# Altium PCB RF315Mhz.PcbDoc (part 1 of 5)
Units mil, origin at the board's own origin, x right, y up, seen from the top; angles counter-clockwise.
Board outline 4094.49 x 3779.53 mil, 2 copper layers (Top Layer, Bottom Layer); 180 components, 20 nets, 660 pads, 48 vias.
Unrouted connection lines stored in the file: 100.
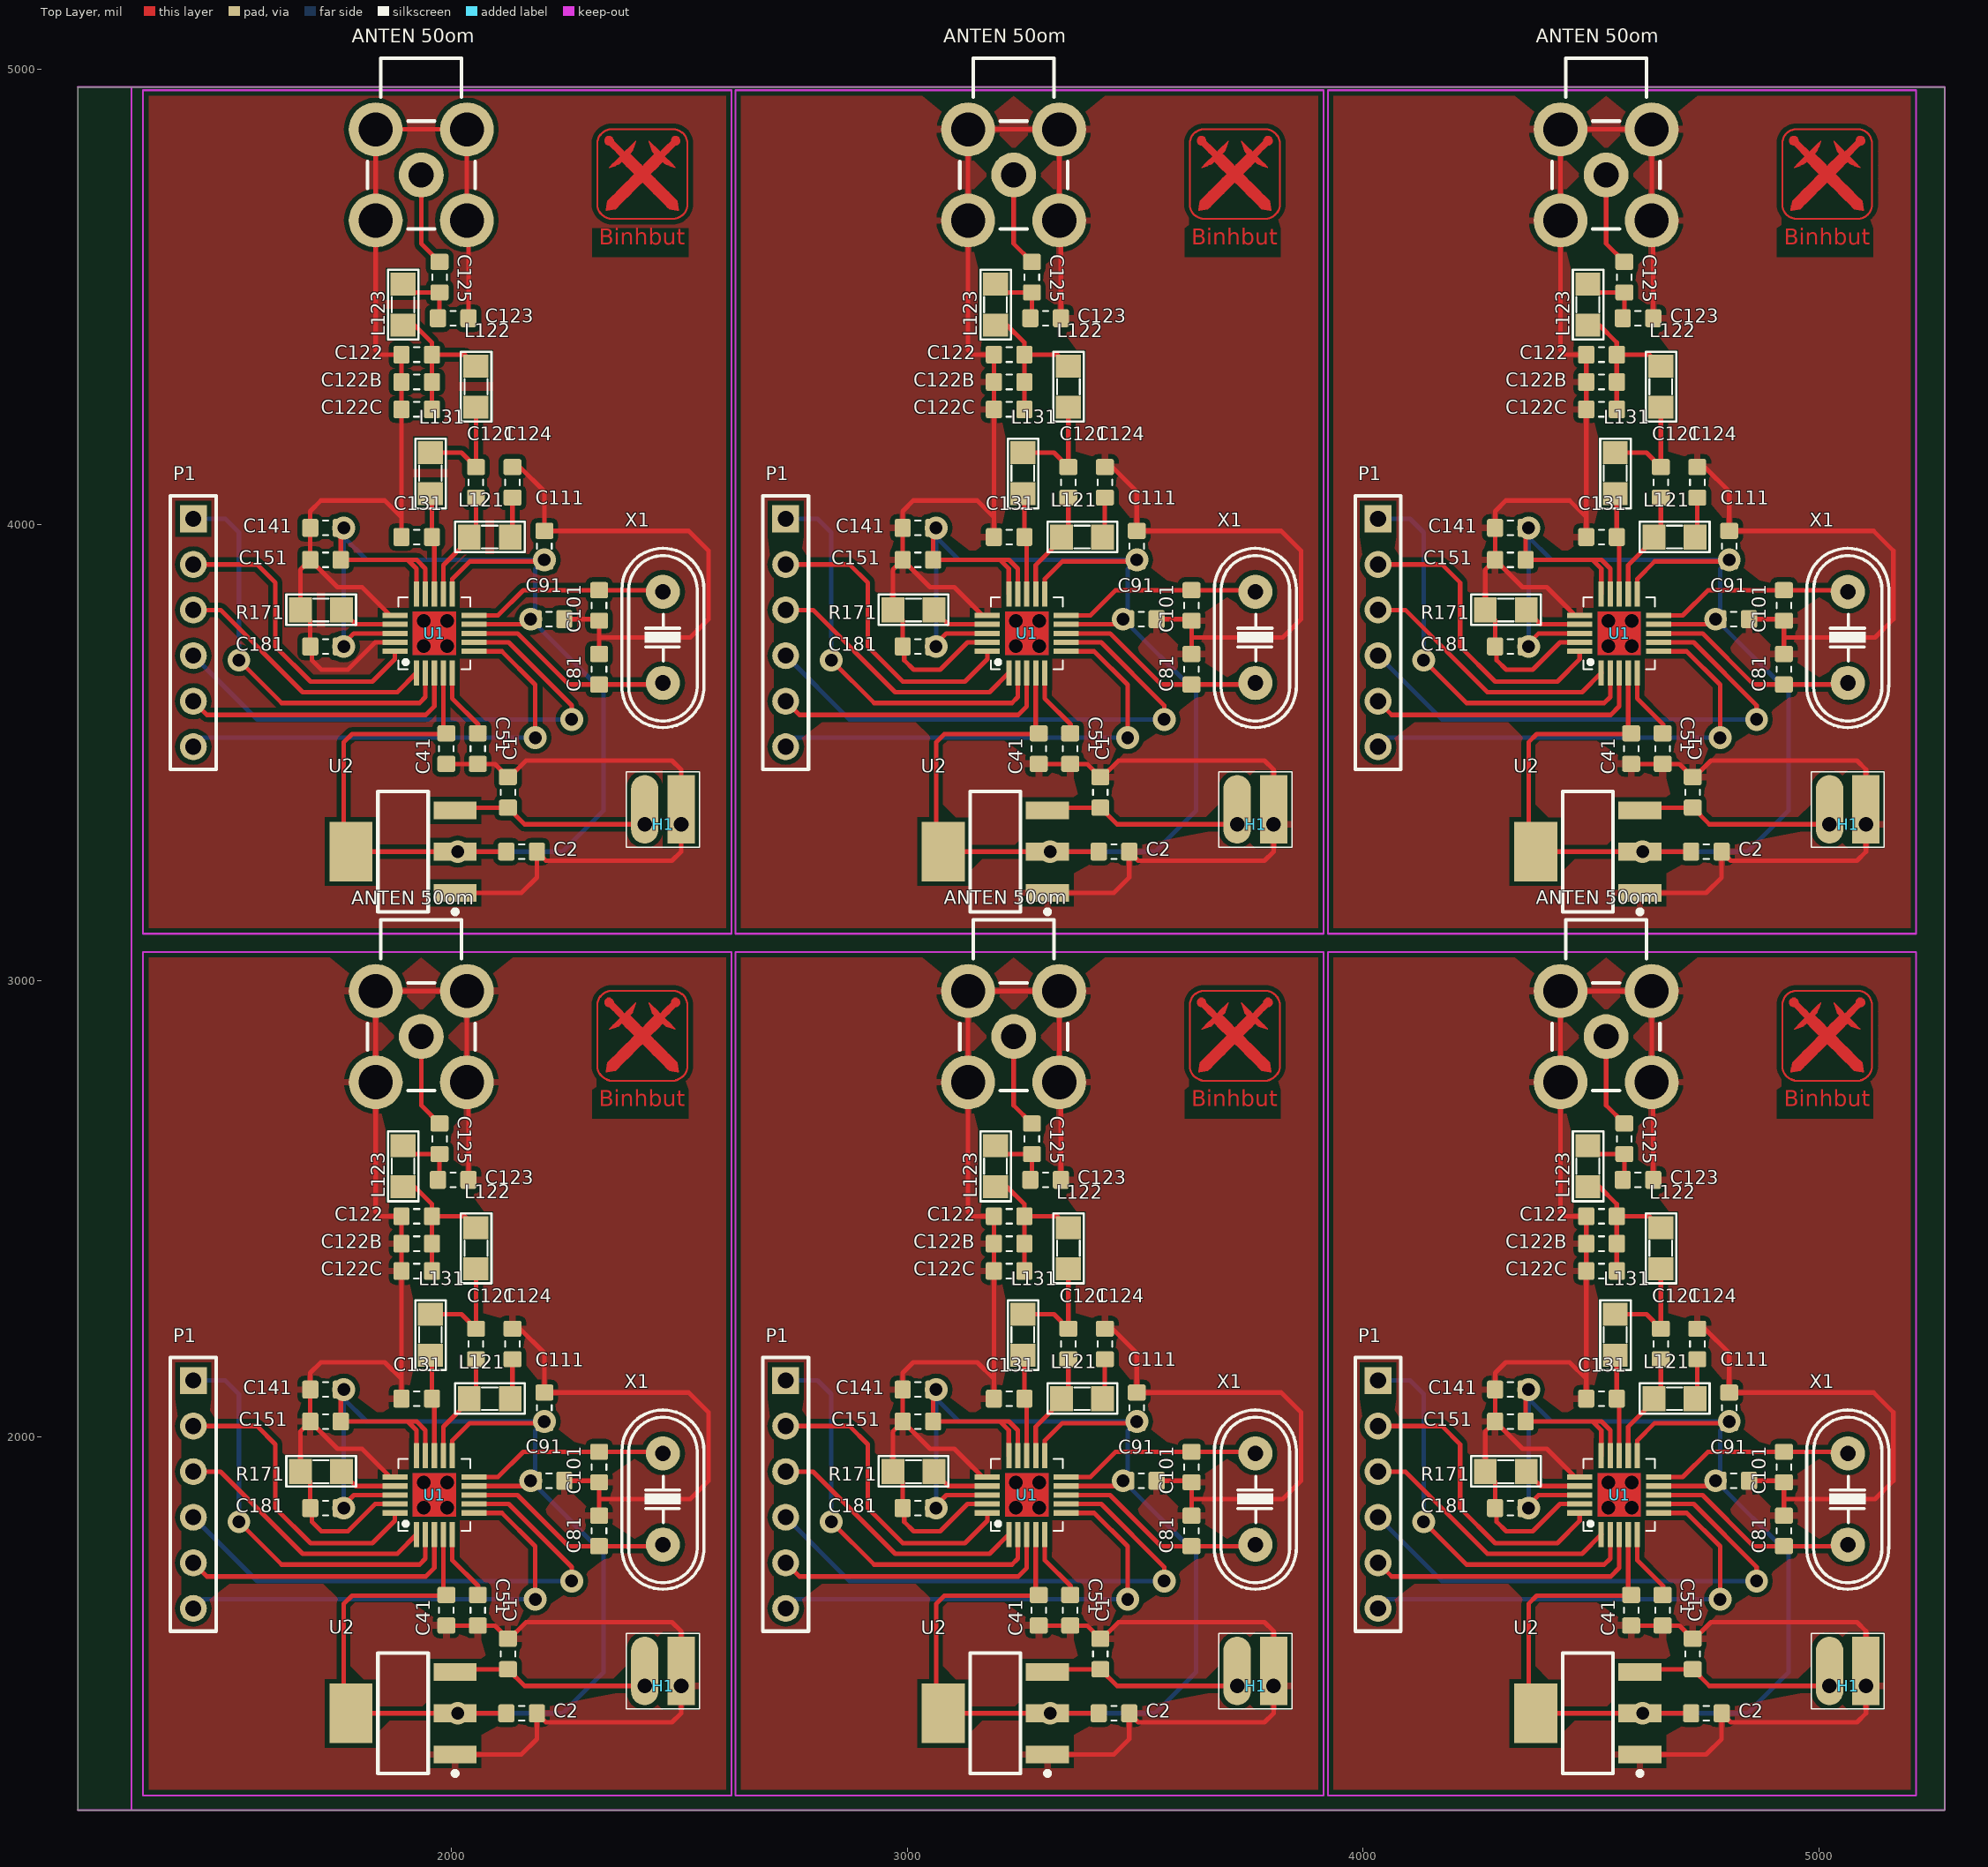
[diagram p0: Top Layer view]
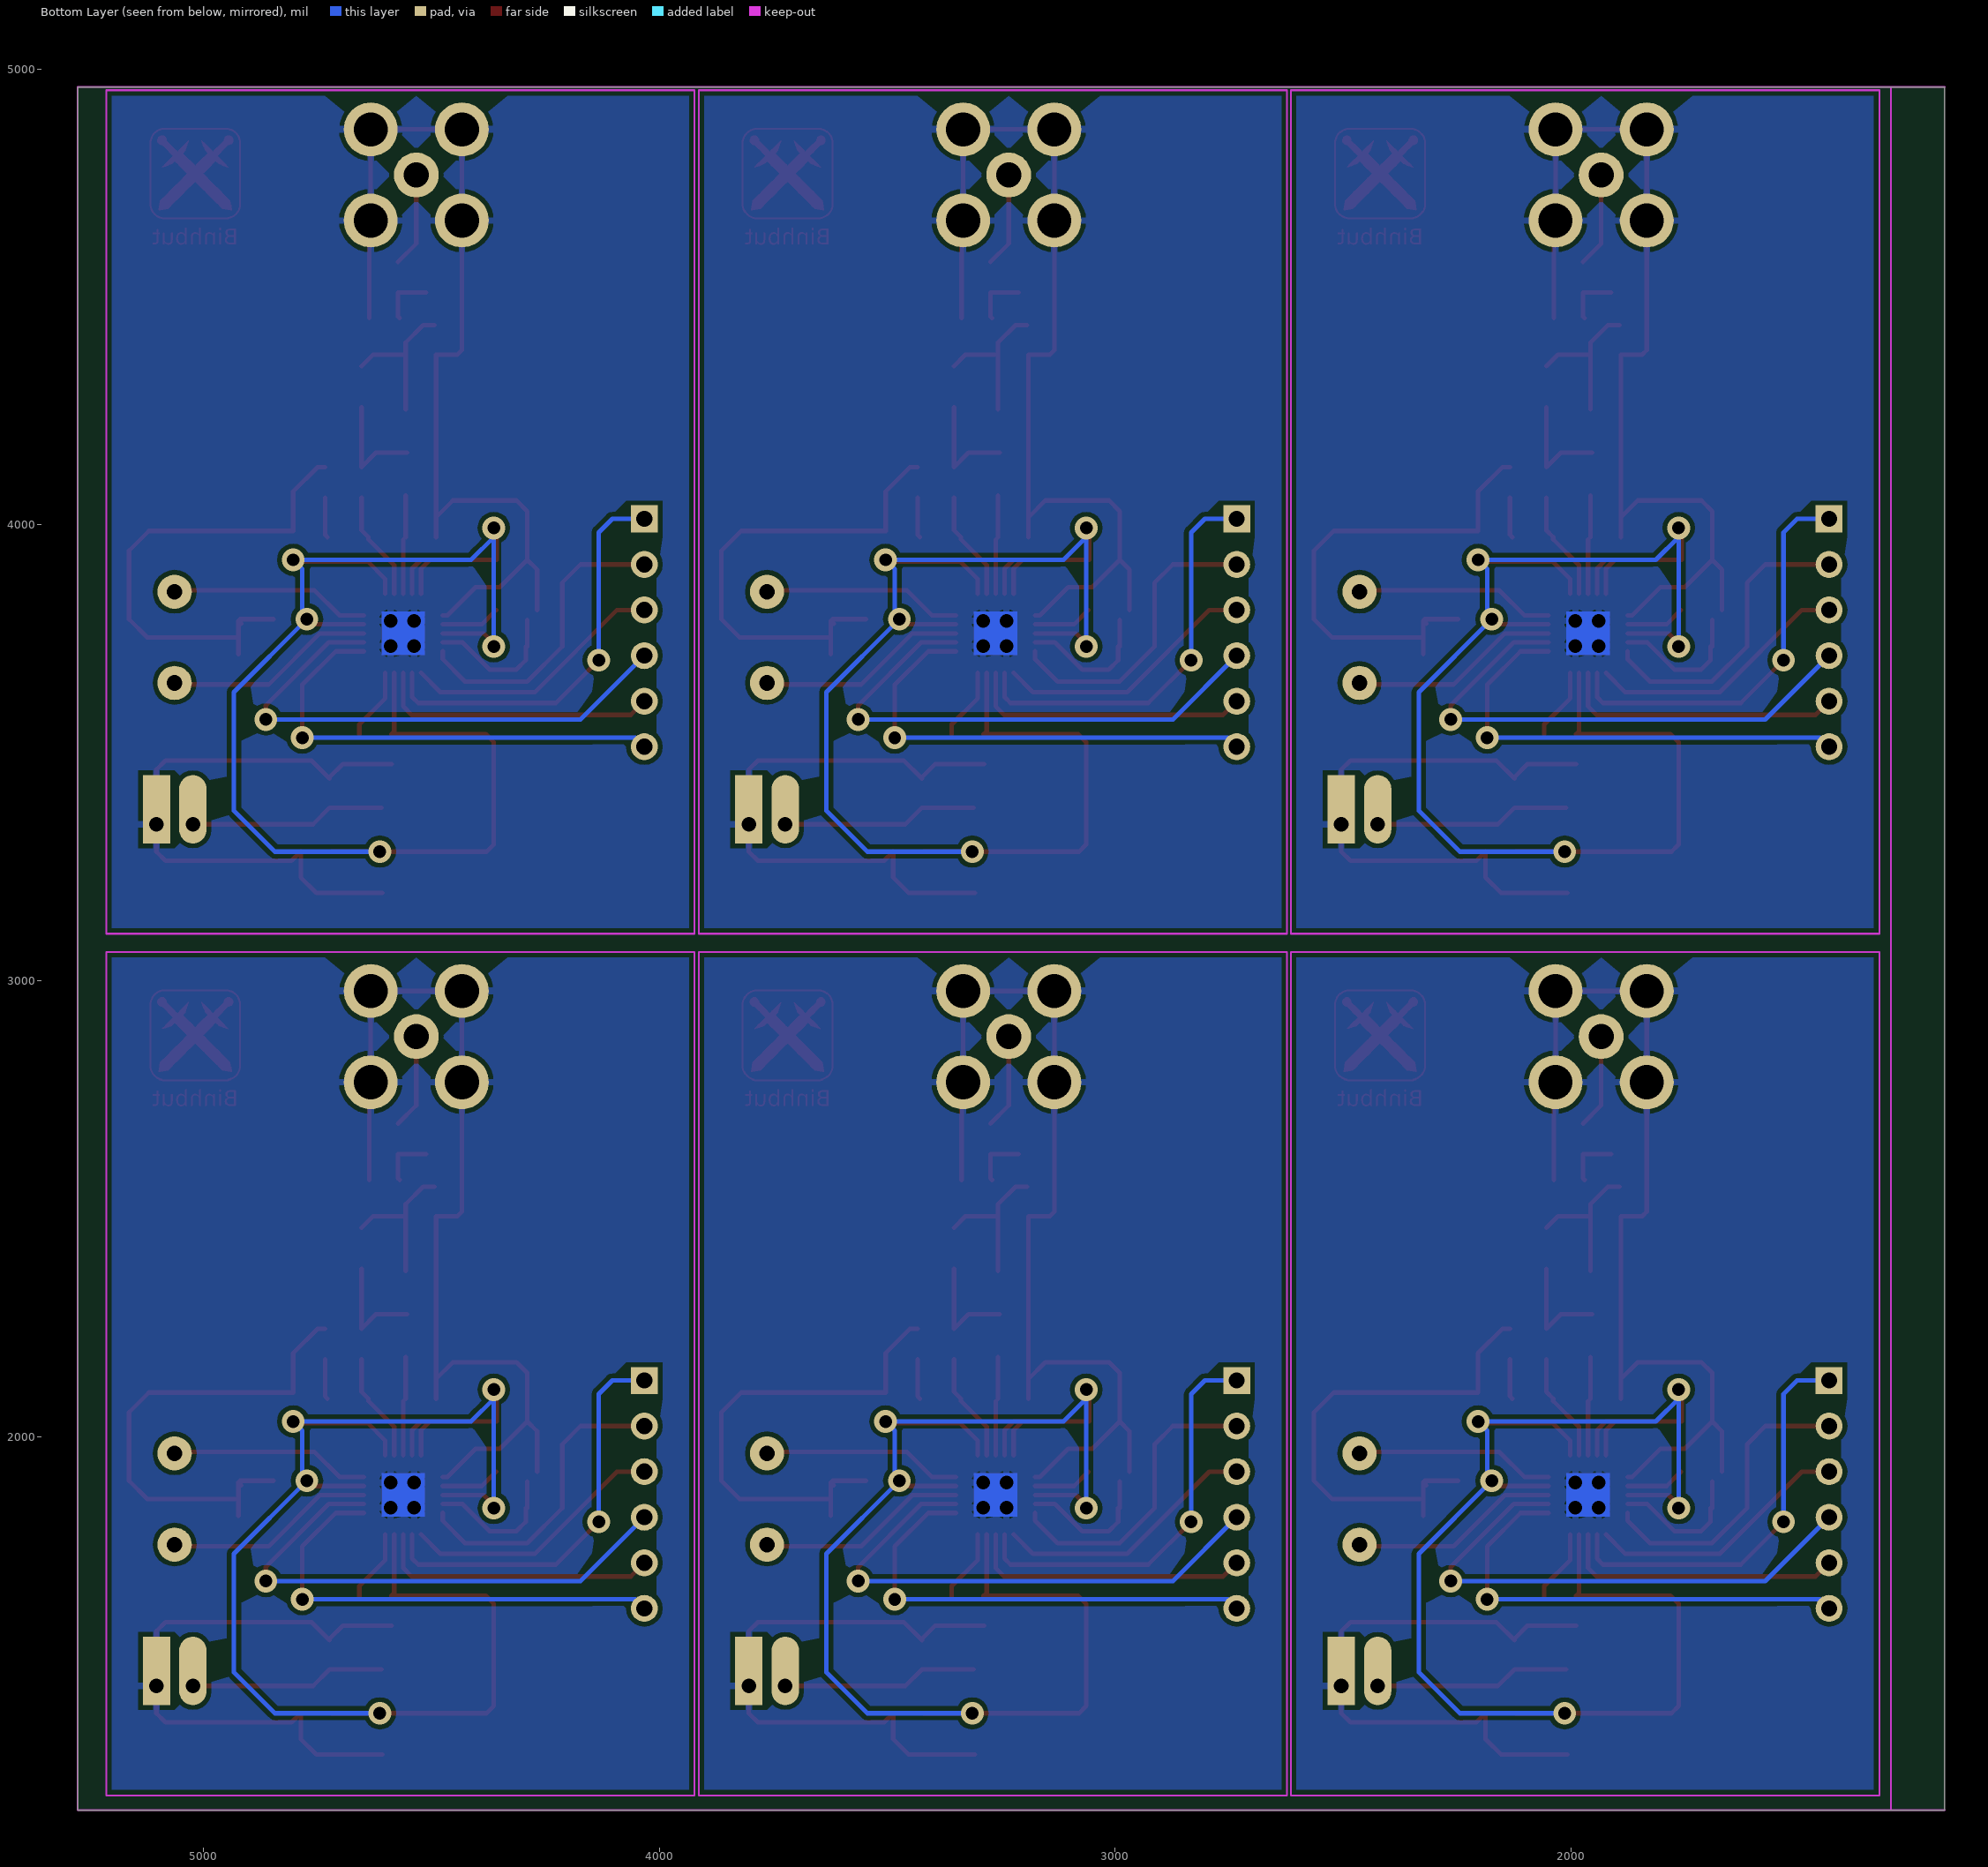
[diagram p1: Bottom Layer view, seen from below]
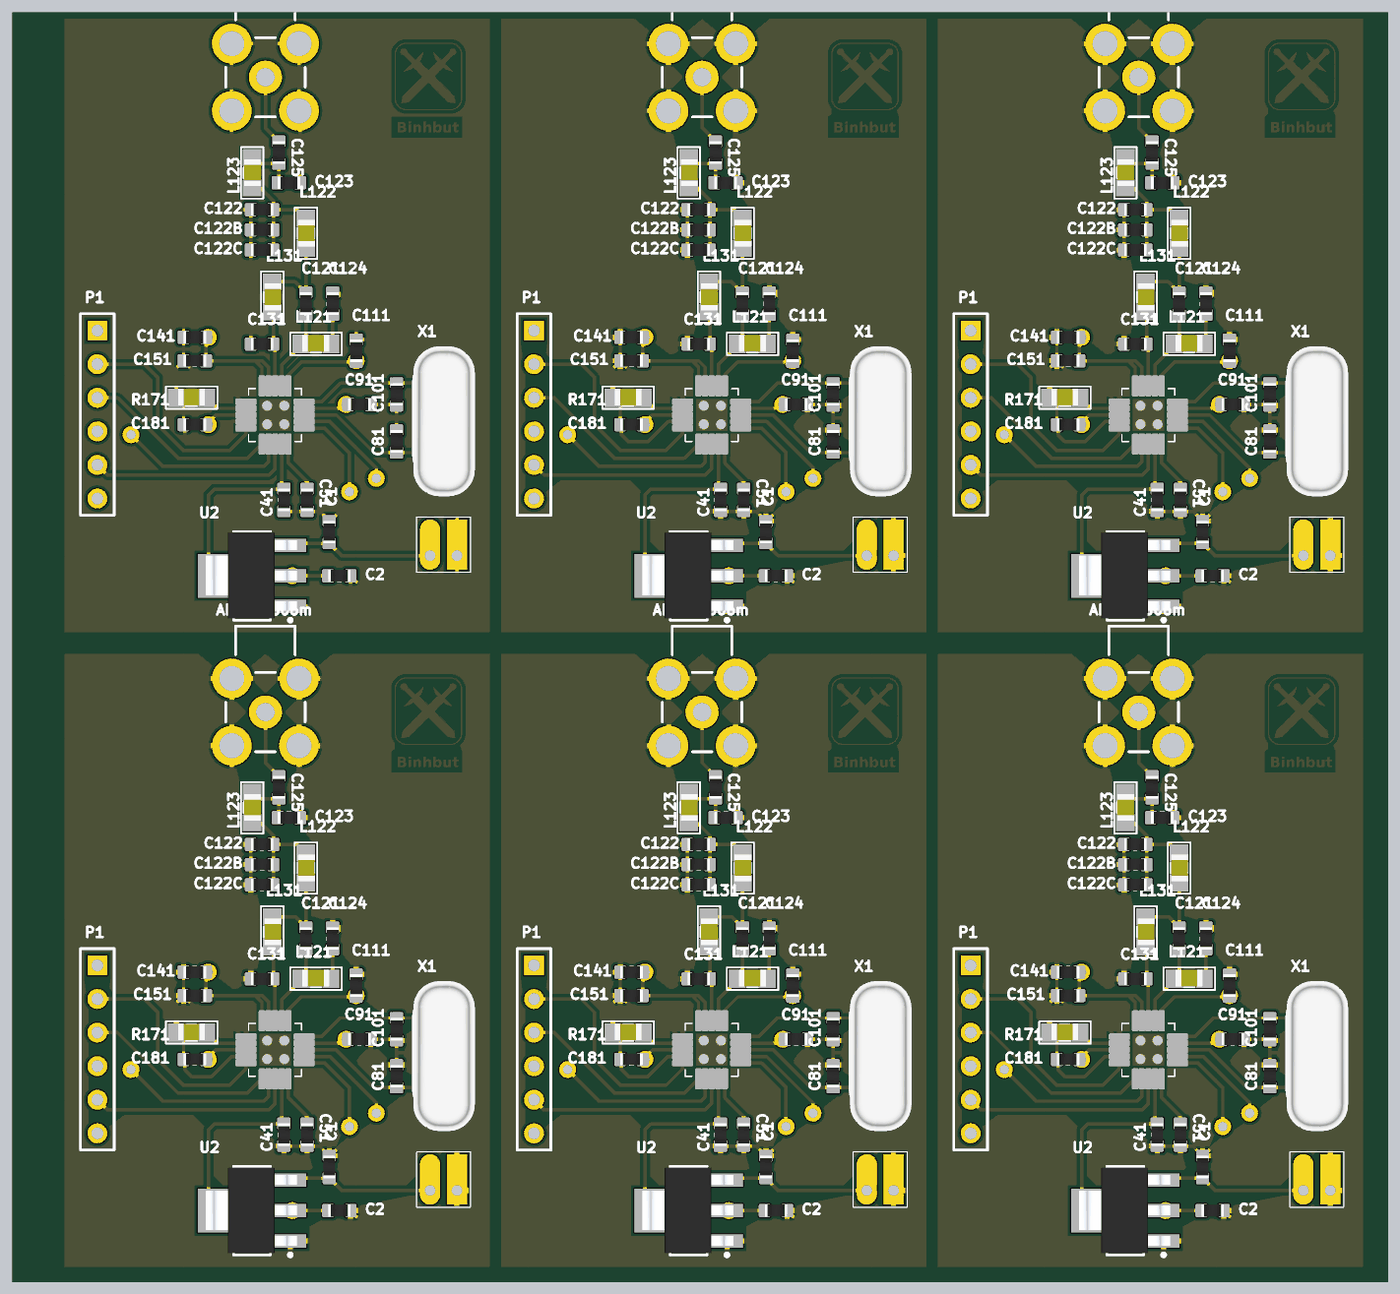
[diagram p6: 3D render of the assembled board from above, using the file's embedded part models]

## Layer stack, top to bottom
Top Layer: signal copper 1.4
Dielectric: dielectric 12.6, FR-4, Dk 4.8
Bottom Layer: signal copper 1.4

## Board outline
1181.1,1181.1 1181.1,4960.63 5275.59,4960.63 5275.59,1181.1

## Design rules (kind name [scope] priority, off if disabled: settings)
Clearance Clearance_1 [InNet('GND')] p1: gap=10
Clearance [All] p2: gap=1
ComponentClearance [All] p1: gap=2 collisioncheckmode=3 verticalgap=2 showdistances=FALSE
PolygonConnect [All] p1: connectstyle=Relief reliefconductorwidth=15 reliefentries=4 polygonreliefangle="90 Angle" airgapwidth=10
RoutingVias [All] p1: holewidth=28 width=50 viastyle="Through Hole" minholewidth=28 minwidth=50 maxholewidth=28 maxwidth=50
ShortCircuit [All] p1: allowed=TRUE
SilkToSilkClearance [All] p1: silktosilkclearance=2
SilkToSolderMaskClearance [IsPad] p1: minsilkscreentomaskgap=0 clearancetoexposedcopper=TRUE
SolderMaskExpansion [All] p1: expansion=4
Width [All] p1: maxlimit=10 minlimit=10 preferedwidth=10
24 further rules are at their usual default settings.

## Components (designator, comment, footprint, x,y, rotation, side; value= is the part's Value field where it differs from the comment)
"ANTEN 50om" "Header 2" MCX5.08-H5 4532.99,3133.78 r270 top
"ANTEN 50om" "Header 2" MCX5.08-H5 4532.99,5023.54 r270 top
"ANTEN 50om" "Header 2" MCX5.08-H5 3233.78,5023.54 r270 top
"ANTEN 50om" "Header 2" MCX5.08-H5 1934.57,5023.54 r270 top
"ANTEN 50om" "Header 2" MCX5.08-H5 3233.78,3133.78 r270 top
"ANTEN 50om" "Header 2" MCX5.08-H5 1934.57,3133.78 r270 top
C1 "104" 0603ESDA 4722.99,1523.78 r270 top
C1 "104" 0603ESDA 4722.99,3413.54 r270 top
C1 "104" 0603ESDA 3423.78,3413.54 r270 top
C1 "104" 0603ESDA 2124.57,3413.54 r270 top
C1 "104" 0603ESDA 3423.78,1523.78 r270 top
C1 "104" 0603ESDA 2124.57,1523.78 r270 top
C2 "104" 0603ESDA 4752.99,1393.78 r180 top
C2 "104" 0603ESDA 4752.99,3283.54 r180 top
C2 "104" 0603ESDA 3453.78,3283.54 r180 top
C2 "104" 0603ESDA 2154.57,3283.54 r180 top
C2 "104" 0603ESDA 3453.78,1393.78 r180 top
C2 "104" 0603ESDA 2154.57,1393.78 r180 top
C41 "104" 0603ESDA 4587.99,1619.78 r90 top
C41 "104" 0603ESDA 4587.99,3509.54 r90 top
C41 "104" 0603ESDA 3288.78,3509.54 r90 top
C41 "104" 0603ESDA 1989.57,3509.54 r90 top
C41 "104" 0603ESDA 3288.78,1619.78 r90 top
C41 "104" 0603ESDA 1989.57,1619.78 r90 top
C51 "104" 0603ESDA 4656.99,1619.78 r90 top
C51 "104" 0603ESDA 4656.99,3509.54 r90 top
C51 "104" 0603ESDA 3357.78,3509.54 r90 top
C51 "104" 0603ESDA 2058.57,3509.54 r90 top
C51 "104" 0603ESDA 3357.78,1619.78 r90 top
C51 "104" 0603ESDA 2058.57,1619.78 r90 top
C81 "27pF" 0603ESDA 4922.99,1793.78 r270 top
C81 "27pF" 0603ESDA 4922.99,3683.54 r270 top
C81 "27pF" 0603ESDA 3623.78,3683.54 r270 top
C81 "27pF" 0603ESDA 2324.57,3683.54 r270 top
C81 "27pF" 0603ESDA 3623.78,1793.78 r270 top
C81 "27pF" 0603ESDA 2324.57,1793.78 r270 top
C91 "103" 0603ESDA 4812.99,1903.78 r180 top
C91 "103" 0603ESDA 4812.99,3793.54 r180 top
C91 "103" 0603ESDA 3513.78,3793.54 r180 top
C91 "103" 0603ESDA 2214.57,3793.54 r180 top
C91 "103" 0603ESDA 3513.78,1903.78 r180 top
C91 "103" 0603ESDA 2214.57,1903.78 r180 top
C101 "27pF" 0603ESDA 4922.99,1933.78 r90 top
C101 "27pF" 0603ESDA 4922.99,3823.54 r90 top
C101 "27pF" 0603ESDA 3623.78,3823.54 r90 top
C101 "27pF" 0603ESDA 2324.57,3823.54 r90 top
C101 "27pF" 0603ESDA 3623.78,1933.78 r90 top
C101 "27pF" 0603ESDA 2324.57,1933.78 r90 top
C111 "220pF" 0603ESDA 4802.99,2063.78 r270 top
C111 "220pF" 0603ESDA 4802.99,3953.54 r270 top
C111 "220pF" 0603ESDA 3503.78,3953.54 r270 top
C111 "220pF" 0603ESDA 2204.57,3953.54 r270 top
C111 "220pF" 0603ESDA 3503.78,2063.78 r270 top
C111 "220pF" 0603ESDA 2204.57,2063.78 r270 top
C121 "6.8pF" 0603ESDA 4652.99,2203.78 r270 top
C121 "6.8pF" 0603ESDA 4652.99,4093.54 r270 top
C121 "6.8pF" 0603ESDA 3353.78,4093.54 r270 top
C121 "6.8pF" 0603ESDA 2054.57,4093.54 r270 top
C121 "6.8pF" 0603ESDA 3353.78,2203.78 r270 top
C121 "6.8pF" 0603ESDA 2054.57,2203.78 r270 top
C122 "12pF" 0603ESDA 4522.99,2483.78 r180 top
C122 "12pF" 0603ESDA 4522.99,4373.54 r180 top
C122 "12pF" 0603ESDA 3223.78,4373.54 r180 top
C122 "12pF" 0603ESDA 1924.57,4373.54 r180 top
C122 "12pF" 0603ESDA 3223.78,2483.78 r180 top
C122 "12pF" 0603ESDA 1924.57,2483.78 r180 top
C122B "12pF" 0603ESDA 4522.99,2423.78 r180 top
C122B "12pF" 0603ESDA 4522.99,4313.54 r180 top
C122B "12pF" 0603ESDA 3223.78,4313.54 r180 top
C122B "12pF" 0603ESDA 1924.57,4313.54 r180 top
C122B "12pF" 0603ESDA 3223.78,2423.78 r180 top
C122B "12pF" 0603ESDA 1924.57,2423.78 r180 top
C122C "12pF" 0603ESDA 4522.99,2363.78 r180 top
C122C "12pF" 0603ESDA 4522.99,4253.54 r180 top
C122C "12pF" 0603ESDA 3223.78,4253.54 r180 top
C122C "12pF" 0603ESDA 1924.57,4253.54 r180 top
C122C "12pF" 0603ESDA 3223.78,2363.78 r180 top
C122C "12pF" 0603ESDA 1924.57,2363.78 r180 top
C123 "6.8pF" 0603ESDA 4602.99,2563.78 r0 top
C123 "6.8pF" 0603ESDA 4602.99,4453.54 r0 top
C123 "6.8pF" 0603ESDA 3303.78,4453.54 r0 top
C123 "6.8pF" 0603ESDA 2004.57,4453.54 r0 top
C123 "6.8pF" 0603ESDA 3303.78,2563.78 r0 top
C123 "6.8pF" 0603ESDA 2004.57,2563.78 r0 top
C124 "220pF" 0603ESDA 4732.99,2203.78 r270 top
C124 "220pF" 0603ESDA 4732.99,4093.54 r270 top
C124 "220pF" 0603ESDA 3433.78,4093.54 r270 top
C124 "220pF" 0603ESDA 2134.57,4093.54 r270 top
C124 "220pF" 0603ESDA 3433.78,2203.78 r270 top
C124 "220pF" 0603ESDA 2134.57,2203.78 r270 top
C125 "220pF" 0603ESDA 4572.99,2653.78 r90 top
C125 "220pF" 0603ESDA 4572.99,4543.54 r90 top
C125 "220pF" 0603ESDA 3273.78,4543.54 r90 top
C125 "220pF" 0603ESDA 1974.57,4543.54 r90 top
C125 "220pF" 0603ESDA 3273.78,2653.78 r90 top
C125 "220pF" 0603ESDA 1974.57,2653.78 r90 top
C131 "6.8pF" 0603ESDA 4522.99,2083.78 r180 top
C131 "6.8pF" 0603ESDA 4522.99,3973.54 r180 top
C131 "6.8pF" 0603ESDA 3223.78,3973.54 r180 top
C131 "6.8pF" 0603ESDA 1924.57,3973.54 r180 top
C131 "6.8pF" 0603ESDA 3223.78,2083.78 r180 top
C131 "6.8pF" 0603ESDA 1924.57,2083.78 r180 top
C141 "103" 0603ESDA 4322.99,2103.78 r0 top
C141 "103" 0603ESDA 4322.99,3993.54 r0 top
C141 "103" 0603ESDA 3023.78,3993.54 r0 top
C141 "103" 0603ESDA 1724.57,3993.54 r0 top
C141 "103" 0603ESDA 3023.78,2103.78 r0 top
C141 "103" 0603ESDA 1724.57,2103.78 r0 top
C151 "220pF" 0603ESDA 4322.99,2033.78 r180 top
C151 "220pF" 0603ESDA 4322.99,3923.54 r180 top
C151 "220pF" 0603ESDA 3023.78,3923.54 r180 top
C151 "220pF" 0603ESDA 1724.57,3923.54 r180 top
C151 "220pF" 0603ESDA 3023.78,2033.78 r180 top
C151 "220pF" 0603ESDA 1724.57,2033.78 r180 top
C181 "220pF" 0603ESDA 4322.99,1843.78 r180 top
C181 "220pF" 0603ESDA 4322.99,3733.54 r180 top
C181 "220pF" 0603ESDA 3023.78,3733.54 r180 top
C181 "220pF" 0603ESDA 1724.57,3733.54 r180 top
C181 "220pF" 0603ESDA 3023.78,1843.78 r180 top
C181 "220pF" 0603ESDA 1724.57,1843.78 r180 top
H1 "Header 2" HDR1X2 5112.99,1453.78 r180 top
H1 "Header 2" HDR1X2 5112.99,3343.54 r180 top
H1 "Header 2" HDR1X2 3813.78,3343.54 r180 top
H1 "Header 2" HDR1X2 2514.57,3343.54 r180 top
H1 "Header 2" HDR1X2 3813.78,1453.78 r180 top
H1 "Header 2" HDR1X2 2514.57,1453.78 r180 top
L121 "33nH" SM-0805 4682.99,2083.78 r180 top
L121 "33nH" SM-0805 4682.99,3973.54 r180 top
L121 "33nH" SM-0805 3383.78,3973.54 r180 top
L121 "33nH" SM-0805 2084.57,3973.54 r180 top
L121 "33nH" SM-0805 3383.78,2083.78 r180 top
L121 "33nH" SM-0805 2084.57,2083.78 r180 top
L122 "18nH" SM-0805 4652.99,2413.78 r90 top
L122 "18nH" SM-0805 4652.99,4303.54 r90 top
L122 "18nH" SM-0805 3353.78,4303.54 r90 top
L122 "18nH" SM-0805 2054.57,4303.54 r90 top
L122 "18nH" SM-0805 3353.78,2413.78 r90 top
L122 "18nH" SM-0805 2054.57,2413.78 r90 top
L123 "33nH" SM-0805 4492.99,2593.78 r90 top
L123 "33nH" SM-0805 4492.99,4483.54 r90 top
L123 "33nH" SM-0805 3193.78,4483.54 r90 top
L123 "33nH" SM-0805 1894.57,4483.54 r90 top
L123 "33nH" SM-0805 3193.78,2593.78 r90 top
L123 "33nH" SM-0805 1894.57,2593.78 r90 top
L131 "33nH" SM-0805 4552.99,2223.78 r90 top
L131 "33nH" SM-0805 4552.99,4113.54 r90 top
L131 "33nH" SM-0805 3253.78,4113.54 r90 top
L131 "33nH" SM-0805 1954.57,4113.54 r90 top
L131 "33nH" SM-0805 3253.78,2223.78 r90 top
L131 "33nH" SM-0805 1954.57,2223.78 r90 top
P1 "Header 6" HDR1X6 4032.99,2123.78 r270 top
P1 "Header 6" HDR1X6 4032.99,4013.54 r270 top
P1 "Header 6" HDR1X6 2733.78,4013.54 r270 top
P1 "Header 6" HDR1X6 1434.57,4013.54 r270 top
P1 "Header 6" HDR1X6 2733.78,2123.78 r270 top
P1 "Header 6" HDR1X6 1434.57,2123.78 r270 top
R171 "56K" SM-0805 4312.99,1923.78 r180 top
R171 "56K" SM-0805 4312.99,3813.54 r180 top
R171 "56K" SM-0805 3013.78,3813.54 r180 top
R171 "56K" SM-0805 1714.57,3813.54 r180 top
R171 "56K" SM-0805 3013.78,1923.78 r180 top
R171 "56K" SM-0805 1714.57,1923.78 r180 top
U1 "CC1101" QFN-20Pin 4482.99,1793.78 r90 top
U1 "CC1101" QFN-20Pin 4482.99,3683.54 r90 top
U1 "CC1101" QFN-20Pin 3183.78,3683.54 r90 top
U1 "CC1101" QFN-20Pin 1884.57,3683.54 r90 top
U1 "CC1101" QFN-20Pin 3183.78,1793.78 r90 top
U1 "CC1101" QFN-20Pin 1884.57,1793.78 r90 top
U2 "LM1117" SOT223-4N 4492.99,1393.78 r180 top
U2 "LM1117" SOT223-4N 4492.99,3283.54 r180 top
U2 "LM1117" SOT223-4N 3193.78,3283.54 r180 top
U2 "LM1117" SOT223-4N 1894.57,3283.54 r180 top
U2 "LM1117" SOT223-4N 3193.78,1393.78 r180 top
U2 "LM1117" SOT223-4N 1894.57,1393.78 r180 top
X1 "26Mhz" XT2 5062.99,1863.78 r90 top
X1 "26Mhz" XT2 5062.99,3753.54 r90 top
X1 "26Mhz" XT2 3763.78,3753.54 r90 top
X1 "26Mhz" XT2 2464.57,3753.54 r90 top
X1 "26Mhz" XT2 3763.78,1863.78 r90 top
X1 "26Mhz" XT2 2464.57,1863.78 r90 top

## Footprints (in the part's own frame and the unit in brackets; to place one, negate y for a bottom-side part, rotate by r counter-clockwise, add the part's x,y. Pads: shape width x height; smd on the part's side, far side on the other; paste and mask are expansions set on the pad)
0603ESDA [mm] "Chip ESD suppressor, Body 1.6x0.8mm, 0603, IPC Medium Density"
  round 0.254 on Mech14: 0(0,0)
  rrect25% 0.9x1 smd: 1(-0.85,0) 2(0.85,0)
  Top Layer pour cut-out: -0.4,0.6 0.4,0.6 0.4,-0.6 -0.4,-0.6
  silkscreen extent -0.15,-0.41 0.15,0.41, body extent -0.85,-0.45 0.85,0.45, height 0.79
HDR1X2 [mil] "Connector; Header; 2 Position"
  rect 60x150 hole 32 copper offset 0,-33: 1(10,0)
  oval 60x150 hole 32 copper offset 0,-33: 2(90,0)
  silkscreen extent -30,-115 130,50
HDR1X6 [mm] "Connector; Header; 6 Position"
  rect 1.5x1.5 hole 0.9: 1(0,0)
  round 1.5 hole 0.9: 2(2.54,0) 3(5.08,0) 4(7.62,0) 5(10.16,0) 6(12.7,0)
  silkscreen extent -1.27,-1.27 13.97,1.27
MCX5.08-H5 [mm] "Chan anten"
  round 2.5 hole 1.4: 1(6.5,0)
  round 3 hole 1.9: 2(3.96,2.54) 2(3.96,-2.54) 2(9.04,-2.54) 2(9.04,2.54)
  silkscreen extent 0,-3 9.5,3
QFN-20Pin [mm] "QFN 20pin 4x4mm"
  rect 1.4x0.3 smd paste+0.1 mask+0.1: 1(-0.2,-1) 2(-0.2,-1.5) 3(-0.2,-2) 4(-0.2,-2.5) 5(-0.2,-3) 11(4.2,-3) 12(4.2,-2.5) 13(4.2,-2) 14(4.2,-1.5) 15(4.2,-1)
  rect 0.3x1.4 smd paste+0.1 mask+0.1: 6(1,-4.2) 7(1.5,-4.2) 8(2,-4.2) 9(2.5,-4.2) 10(3,-4.2) 16(3,0.2) 17(2.5,0.2) 18(2,0.2) 19(1.5,0.2) 20(1,0.2)
  round 0 hole 0.762: 21(1.3,-1.4) 21(1.3,-2.7) 21(2.7,-2.7) 21(2.7,-1.4)
  Top Layer region: 0.8,-0.8 3.2,-0.8 3.2,-3.2 0.8,-3.2
  Bottom Layer region: 0.8,-0.8 3.2,-0.8 3.2,-3.2 0.8,-3.2
  Top Overlay keep-out circle w0.254: c0.4,-0.4 r0.1
  silkscreen extent 0,-4 4,0
SM-0805 [mil] "Compoment SMD 80x50mil"
  rect 50x55 smd: 1(-45,0) 2(45,0)
  silkscreen extent -77,-34 76,33, body extent -40,-27 40,23, height 24
SOT223-4N [mm] "SOT223, 4-Leads, Body 6.5x3.5mm, Pitch 2.3mm, Lead Span 7mm, IPC Medium Density"
  rect 2.4x1 smd: 1(-2.9,2.3) 2(-2.9,0) 3(-2.9,-2.3)
  rect 2.4x3.3 smd: 4(2.9,0)
  silkscreen extent -3.03,-3.35 1.4,3.47, body extent -3.39,-3.27 3.5,3.23, height 1.72
XT2 [mil] "Footpin for Crystal 2 pin"
  round 75 hole 34: 1(-100,0) 2(100,0)
  silkscreen extent -198,-90 195,90, body extent -233,-93 213,90, height 138

## Part data
"ANTEN 50om" "ANTEN 50om" "ANTEN 50om" "ANTEN 50om" "ANTEN 50om" "ANTEN 50om" H1 H1 H1 H1 H1 H1: library part Hed2, "Header 2 (Green)"
C1 C1 C1 C1 C1 C1 C2 C2 C2 C2 C2 C2: library part Cap, "Capacitor"
C41 C41 C41 C41 C41 C41 C51 C51 C51 C51 C51 C51 C81 C81 C81 C81 C81 C81 C91 C91 C91 C91 C91 C91 C101 C101 C101 C101 C101 C101 C111 C111 C111 C111 C111 C111 C121 C121 C121 C121 C121 C121 C122 C122 C122 C122 C122 C122 C122B C122B C122B C122B C122B C122B C122C C122C C122C C122C C122C C122C C123 C123 C123 C123 C123 C123 C124 C124 C124 C124 C124 C124 C125 C125 C125 C125 C125 C125 C131 C131 C131 C131 C131 C131 C141 C141 C141 C141 C141 C141 C151 C151 C151 C151 C151 C151 C181 C181 C181 C181 C181 C181: library part CM, "Cap SMD"
L121 L121 L121 L121 L121 L121 L122 L122 L122 L122 L122 L122 L123 L123 L123 L123 L123 L123 L131 L131 L131 L131 L131 L131: library part L1, "Inductor"
P1 P1 P1 P1 P1 P1: "Header, 6-Pin"
R171 R171 R171 R171 R171 R171: library part RM, "Resistor SMD"
U1 U1 U1 U1 U1 U1: "Transceiver 315Mhz"
U2 U2 U2 U2 U2 U2: "3v3"
X1 X1 X1 X1 X1 X1: library part XT2, "Crystal For all Crystal 2pin."

## Via types
v1: diameter 50, hole 28, Top Layer to Bottom Layer, 48 vias

## Nets (pads, with @x,y where several pads share a name; then routed paths per layer and width w, separated by ;. In a path a pad name is that pad's centre, name@x,y a point inside that pad or via, vN(x,y) a via of type N, cw(c..) or ccw(c..) an arc to the next point about the centre after c; other vN are vias at no path point)
+3.3V: C2.2 C41.2 C91.2 C111.2 C141.2 C151.1 C181.1 U1.4 U1.9 U1.11 U1.14 U1.15 U1.18 U2.2 U2.4 | length 21717.8
  Top Layer w10: C141.2@1758.03,2103.78 C151.1@1758.03,2033.78 1904.57,2033.78 ; C141.2@1758.03,3993.54 C151.1@1758.03,3923.54 1904.57,3923.54 ; v1(1764.57,1843.78) C181.1@1758.03,1843.78 1786.77,1872.52 U1.18@1876.69,1872.52 ; v1(1764.57,3733.54) C181.1@1758.03,3733.54 1786.77,3762.28 U1.18@1876.69,3762.28 ; U1.15@1923.94,1959.13 1923.94,2014.41 1904.57,2033.78 ; U1.15@1923.94,3848.9 1923.94,3904.17 1904.57,3923.54 ; U1.14@1943.62,1959.13 1943.62,2014.72 1924.57,2033.78 1904.57,2033.78 ; U1.14@1943.62,3848.9 1943.62,3904.49 1924.57,3923.54 1904.57,3923.54 ; U1.4@1982.99,1785.91 1982.99,1657.35 C41.2@1988.57,1651.78 ; U1.4@1982.99,3675.67 1982.99,3547.12 C41.2@1988.57,3541.54 ; C41.2@1989.57,1650.78 C41.2@1988.57,1651.78 ; C41.2@1989.57,1651.78 C41.2@1988.57,1651.78 ; C41.2@1989.57,3540.54 C41.2@1988.57,3541.54 ; C41.2@1989.57,3541.54 C41.2@1988.57,3541.54 ; U1.11@2002.68,1959.13 2002.68,1991.89 2041.1,2030.31 C111.2@2204.57,2030.31 ; U1.11@2002.68,3848.9 2002.68,3881.65 2041.1,3920.08 C111.2@2204.57,3920.08 ; U1.9@2049.92,1892.2 2169.53,1892.2 C91.2@2181.1,1903.78 ; U1.9@2049.92,3781.97 2169.53,3781.97 C91.2@2181.1,3793.54 ; C2.2@2121.1,1393.78 v1(2014.57,1393.78) U2.2@2008.74,1393.78 U2.4@1780.39,1393.78 1764.57,1409.61 1764.57,1633.78 1782.57,1651.78 C41.2@1988.57,1651.78 ; C2.2@2121.1,3283.54 v1(2014.57,3283.54) U2.2@2008.74,3283.54 U2.4@1780.39,3283.54 1764.57,3299.37 1764.57,3523.54 1782.57,3541.54 C41.2@1988.57,3541.54 ; C141.2@3057.24,2103.78 C151.1@3057.24,2033.78 3203.78,2033.78 ; C141.2@3057.24,3993.54 C151.1@3057.24,3923.54 3203.78,3923.54 ; v1(3063.78,1843.78) C181.1@3057.24,1843.78 3085.98,1872.52 U1.18@3175.91,1872.52 ; v1(3063.78,3733.54) C181.1@3057.24,3733.54 3085.98,3762.28 U1.18@3175.91,3762.28 ; U1.15@3223.15,1959.13 3223.15,2014.41 3203.78,2033.78 ; U1.15@3223.15,3848.9 3223.15,3904.17 3203.78,3923.54 ; U1.14@3242.83,1959.13 3242.83,2014.72 3223.78,2033.78 3203.78,2033.78 ; U1.14@3242.83,3848.9 3242.83,3904.49 3223.78,3923.54 3203.78,3923.54 ; U1.4@3282.2,1785.91 3282.2,1657.35 C41.2@3287.78,1651.78 ; U1.4@3282.2,3675.67 3282.2,3547.12 C41.2@3287.78,3541.54 ; C41.2@3288.78,1650.78 C41.2@3287.78,1651.78 ; C41.2@3288.78,1651.78 C41.2@3287.78,1651.78 ; C41.2@3288.78,3540.54 C41.2@3287.78,3541.54 ; C41.2@3288.78,3541.54 C41.2@3287.78,3541.54 ; U1.11@3301.89,1959.13 3301.89,1991.89 3340.31,2030.32 C111.2@3503.78,2030.32 ; U1.11@3301.89,3848.9 3301.89,3881.65 3340.31,3920.08 C111.2@3503.78,3920.08 ; U1.9@3349.13,1892.2 3468.74,1892.2 C91.2@3480.31,1903.78 ; U1.9@3349.13,3781.97 3468.74,3781.97 C91.2@3480.31,3793.54 ; C2.2@3420.31,1393.78 v1(3313.78,1393.78) U2.2@3307.95,1393.78 U2.4@3079.61,1393.78 3063.78,1409.61 3063.78,1633.78 3081.78,1651.78 C41.2@3287.78,1651.78 ; C2.2@3420.31,3283.54 v1(3313.78,3283.54) U2.2@3307.95,3283.54 U2.4@3079.61,3283.54 3063.78,3299.37 3063.78,3523.54 3081.78,3541.54 C41.2@3287.78,3541.54 ; C141.2@4356.46,2103.78 C151.1@4356.46,2033.78 4502.99,2033.78 ; C141.2@4356.46,3993.54 C151.1@4356.46,3923.54 4502.99,3923.54 ; v1(4362.99,1843.78) C181.1@4356.46,1843.78 4385.2,1872.52 U1.18@4475.12,1872.52 ; v1(4362.99,3733.54) C181.1@4356.46,3733.54 4385.2,3762.28 U1.18@4475.12,3762.28 ; U1.15@4522.36,1959.13 4522.36,2014.41 4502.99,2033.78 ; U1.15@4522.36,3848.9 4522.36,3904.17 4502.99,3923.54 ; U1.14@4542.05,1959.13 4542.05,2014.72 4522.99,2033.78 4502.99,2033.78 ; U1.14@4542.05,3848.9 4542.05,3904.49 4522.99,3923.54 4502.99,3923.54 ; U1.4@4581.42,1785.91 4581.42,1657.35 C41.2@4586.99,1651.78 ; U1.4@4581.42,3675.67 4581.42,3547.12 C41.2@4586.99,3541.54 ; C41.2@4587.99,1650.78 C41.2@4586.99,1651.78 ; C41.2@4587.99,1651.78 C41.2@4586.99,1651.78 ; C41.2@4587.99,3540.54 C41.2@4586.99,3541.54 ; C41.2@4587.99,3541.54 C41.2@4586.99,3541.54 ; U1.11@4601.1,1959.13 4601.1,1991.89 4639.53,2030.31 C111.2@4802.99,2030.31 ; U1.11@4601.1,3848.9 4601.1,3881.65 4639.53,3920.08 C111.2@4802.99,3920.08 ; U1.9@4648.35,1892.2 4767.95,1892.2 C91.2@4779.53,1903.78 ; U1.9@4648.35,3781.97 4767.95,3781.97 C91.2@4779.53,3793.54 ; C2.2@4719.53,1393.78 v1(4612.99,1393.78) U2.2@4607.17,1393.78 U2.4@4378.82,1393.78 4362.99,1409.61 4362.99,1633.78 4380.99,1651.78 C41.2@4586.99,1651.78 ; C2.2@4719.53,3283.54 v1(4612.99,3283.54) U2.2@4607.17,3283.54 U2.4@4378.82,3283.54 4362.99,3299.37 4362.99,3523.54 4380.99,3541.54 C41.2@4586.99,3541.54
  Bottom Layer w10: v1(1764.57,1843.78) v1@1764.57,2083.78 ; v1(1764.57,3733.54) v1@1764.57,3973.54 ; v1(2014.57,1393.78) 2244.57,1393.78 2334.57,1483.78 2334.57,1743.78 v1(2174.57,1903.78) 2184.57,1903.78 2184.57,2013.78 v1(2204.57,2033.78) 1814.57,2033.78 v1@1764.57,2083.78 ; v1(2014.57,3283.54) 2244.57,3283.54 2334.57,3373.54 2334.57,3633.54 v1(2174.57,3793.54) 2184.57,3793.54 2184.57,3903.54 v1(2204.57,3923.54) 1814.57,3923.54 v1@1764.57,3973.54 ; v1(3063.78,1843.78) v1@3063.78,2083.78 ; v1(3063.78,3733.54) v1@3063.78,3973.54 ; v1(3313.78,1393.78) 3543.78,1393.78 3633.78,1483.78 3633.78,1743.78 v1(3473.78,1903.78) 3483.78,1903.78 3483.78,2013.78 v1(3503.78,2033.78) 3113.78,2033.78 v1@3063.78,2083.78 ; v1(3313.78,3283.54) 3543.78,3283.54 3633.78,3373.54 3633.78,3633.54 v1(3473.78,3793.54) 3483.78,3793.54 3483.78,3903.54 v1(3503.78,3923.54) 3113.78,3923.54 v1@3063.78,3973.54 ; v1(4362.99,1843.78) v1@4362.99,2083.78 ; v1(4362.99,3733.54) v1@4362.99,3973.54 ; v1(4612.99,1393.78) 4842.99,1393.78 4932.99,1483.78 4932.99,1743.78 v1(4772.99,1903.78) 4782.99,1903.78 4782.99,2013.78 v1(4802.99,2033.78) 4412.99,2033.78 v1@4362.99,2083.78 ; v1(4612.99,3283.54) 4842.99,3283.54 4932.99,3373.54 4932.99,3633.54 v1(4772.99,3793.54) 4782.99,3793.54 4782.99,3903.54 v1(4802.99,3923.54) 4412.99,3923.54 v1@4362.99,3973.54 ; v1@1764.57,2083.78 v1@1764.57,2093.78 ; v1@1764.57,2093.78 1754.57,2103.78 v1(1764.57,2103.78) v1@1764.57,2093.78 ; v1@1764.57,3973.54 v1@1764.57,3983.54 ; v1@1764.57,3983.54 v1(1764.57,3993.54) 1754.57,3993.54 v1@1764.57,3983.54 ; v1@3063.78,2083.78 v1@3063.78,2093.78 ; v1@3063.78,2093.78 v1(3063.78,2103.78) 3053.78,2103.78 v1@3063.78,2093.78 ; v1@3063.78,3973.54 v1@3063.78,3983.54 ; v1@3063.78,3983.54 v1(3063.78,3993.54) 3053.78,3993.54 v1@3063.78,3983.54 ; v1@4362.99,2083.78 v1@4362.99,2093.78 ; v1@4362.99,2093.78 v1(4362.99,2103.78) 4352.99,2103.78 v1@4362.99,2093.78 ; v1@4362.99,3973.54 v1@4362.99,3983.54 ; v1@4362.99,3983.54 v1(4362.99,3993.54) 4352.99,3993.54 v1@4362.99,3983.54
+5V: C1.2 H1.2 U2.3 | length 2571.6
  Top Layer w10: U2.3@2011.1,1490.31 C1.2@2124.57,1490.31 2161.1,1453.78 H1.2@2424.57,1453.78 ; U2.3@2011.1,3380.08 C1.2@2124.57,3380.08 2161.1,3343.54 H1.2@2424.57,3343.54 ; U2.3@3310.31,1490.32 C1.2@3423.78,1490.32 3460.31,1453.78 H1.2@3723.78,1453.78 ; U2.3@3310.31,3380.08 C1.2@3423.78,3380.08 3460.31,3343.54 H1.2@3723.78,3343.54 ; U2.3@4609.53,1490.31 C1.2@4722.99,1490.31 4759.53,1453.78 H1.2@5022.99,1453.78 ; U2.3@4609.53,3380.08 C1.2@4722.99,3380.08 4759.53,3343.54 H1.2@5022.99,3343.54
CSN: P1.4 U1.7 | length 7144.9
  Top Layer w10: U1.7@2049.92,1852.83 2126.51,1852.83 2264.57,1714.78 v1(2264.57,1683.78) ; U1.7@2049.92,3742.6 2126.51,3742.6 2264.57,3604.54 v1(2264.57,3573.54) ; U1.7@3349.13,1852.83 3425.72,1852.83 3563.78,1714.78 v1(3563.78,1683.78) ; U1.7@3349.13,3742.6 3425.72,3742.6 3563.78,3604.54 v1(3563.78,3573.54) ; U1.7@4648.35,1852.83 4724.94,1852.83 4862.99,1714.78 v1(4862.99,1683.78) ; U1.7@4648.35,3742.6 4724.94,3742.6 4862.99,3604.54 v1(4862.99,3573.54)
  Bottom Layer w10: P1.4@1434.57,1823.78 1574.57,1683.78 v1(2264.57,1683.78) ; P1.4@1434.57,3713.54 1574.57,3573.54 v1(2264.57,3573.54) ; P1.4@2733.78,1823.78 2873.78,1683.78 v1(3563.78,1683.78) ; P1.4@2733.78,3713.54 2873.78,3573.54 v1(3563.78,3573.54) ; P1.4@4032.99,1823.78 4172.99,1683.78 v1(4862.99,1683.78) ; P1.4@4032.99,3713.54 4172.99,3573.54 v1(4862.99,3573.54)
GDO0: P1.6 U1.6 | length 6066.2
  Top Layer w10: U1.6@2049.92,1833.15 2111.2,1833.15 2184.57,1759.78 2184.57,1699.78 v1(2184.57,1643.78) ; U1.6@2049.92,3722.91 2111.2,3722.91 2184.57,3649.54 2184.57,3589.54 v1(2184.57,3533.54) ; U1.6@3349.13,1833.15 3410.41,1833.15 3483.78,1759.78 3483.78,1699.78 v1(3483.78,1643.78) ; U1.6@3349.13,3722.91 3410.41,3722.91 3483.78,3649.54 3483.78,3589.54 v1(3483.78,3533.54) ; U1.6@4648.35,1833.15 4709.62,1833.15 4782.99,1759.78 4782.99,1699.78 v1(4782.99,1643.78) ; U1.6@4648.35,3722.91 4709.62,3722.91 4782.99,3649.54 4782.99,3589.54 v1(4782.99,3533.54)
  Bottom Layer w10: P1.6@1454.57,1643.78 v1(2184.57,1643.78) ; P1.6@1454.57,3533.54 v1(2184.57,3533.54) ; P1.6@2753.78,1643.78 v1(3483.78,1643.78) ; P1.6@2753.78,3533.54 v1(3483.78,3533.54) ; P1.6@4052.99,1643.78 v1(4782.99,1643.78) ; P1.6@4052.99,3533.54 v1(4782.99,3533.54)
GDO2: P1.5 U1.3 | length 3649
  Top Layer w10: P1.5@1444.57,1713.78 1464.57,1693.78 1944.57,1693.78 1963.31,1712.52 U1.3@1963.31,1785.91 ; P1.5@1444.57,3603.54 1464.57,3583.54 1944.57,3583.54 1963.31,3602.28 U1.3@1963.31,3675.67 ; P1.5@2743.78,1713.78 2763.78,1693.78 3243.78,1693.78 3262.52,1712.52 U1.3@3262.52,1785.91 ; P1.5@2743.78,3603.54 2763.78,3583.54 3243.78,3583.54 3262.52,3602.28 U1.3@3262.52,3675.67 ; P1.5@4042.99,1713.78 4062.99,1693.78 4542.99,1693.78 4561.73,1712.52 U1.3@4561.73,1785.91 ; P1.5@4042.99,3603.54 4062.99,3583.54 4542.99,3583.54 4561.73,3602.28 U1.3@4561.73,3675.67
GND: "ANTEN 50om.2" C1.1 C2.1 C41.1 C51.1 C81.1 C91.1 C101.1 C111.1 C122.2 C122B.2 C122C.2 C123.2 C124.1 C131.2 C141.1 C151.2 C181.2 H1.1 R171.2 U1.16 U1.19 U1.21 U2.1 | length 29940.5
  Top Layer w10: R171.2@1669.57,1923.78 1669.57,2012.24 C151.2@1691.1,2033.78 ; R171.2@1669.57,3813.54 1669.57,3902.01 C151.2@1691.1,3923.54 ; C181.2@1691.1,1843.78 R171.2@1691.1,1902.24 ; C181.2@1691.1,3733.54 R171.2@1691.1,3792.01 ; C181.2@1694.57,1843.78 1694.57,1813.78 1715.57,1792.78 1773.57,1792.78 1833.62,1852.83 U1.19@1876.69,1852.83 ; C181.2@1694.57,3733.54 1694.57,3703.54 1715.57,3682.54 1773.57,3682.54 1833.62,3742.6 U1.19@1876.69,3742.6 ; U1.16@1876.69,1911.89 1866.46,1911.89 1804.57,1973.78 1751.1,1973.78 C151.2@1691.1,2033.78 ; U1.16@1876.69,3801.65 1866.46,3801.65 1804.57,3863.54 1751.1,3863.54 C151.2@1691.1,3923.54 ; C131.2@1891.1,2083.78 1891.1,2127.24 ; C131.2@1891.1,3973.54 1891.1,4017.01 ; C41.1@1988.57,1585.78 2096.03,1585.78 C1.1@2124.57,1557.24 ; C41.1@1988.57,3475.54 2096.03,3475.54 C1.1@2124.57,3447.01 ; U2.1@2008.74,1303.23 2154.02,1303.23 2188.03,1337.24 C2.1@2188.03,1393.78 2208.03,1373.78 2484.57,1373.78 2504.57,1393.78 H1.1@2504.57,1453.78 2504.57,1573.78 2484.57,1593.78 2164.57,1593.78 C1.1@2124.57,1553.78 ; U2.1@2008.74,3192.99 2154.02,3192.99 2188.03,3227.01 C2.1@2188.03,3283.54 2208.03,3263.54 2484.57,3263.54 2504.57,3283.54 H1.1@2504.57,3343.54 2504.57,3463.54 2484.57,3483.54 2164.57,3483.54 C1.1@2124.57,3443.54 ; C123.2@2038.03,2563.78 2038.03,2774.41 2034.57,2777.87 2034.57,2977.87 1834.57,2977.87 1834.57,2777.87 1834.57,2493.78 1844.57,2483.78 C122.2@1891.1,2483.78 C122B.2@1891.1,2423.78 C122C.2@1891.1,2363.78 1891.1,2127.24 ; C123.2@2038.03,4453.54 2038.03,4664.17 2034.57,4667.64 2034.57,4867.64 1834.57,4867.64 1834.57,4667.64 1834.57,4383.54 1844.57,4373.54 C122.2@1891.1,4373.54 C122B.2@1891.1,4313.54 C122C.2@1891.1,4253.54 1891.1,4017.01 ; C124.1@2134.57,2237.24 2151.1,2237.24 2204.57,2183.78 C111.1@2204.57,2097.24 2521.1,2097.24 2564.57,2053.78 2564.57,1903.78 2524.57,1863.78 2324.57,1863.78 ; C124.1@2134.57,4127.01 2151.1,4127.01 2204.57,4073.54 C111.1@2204.57,3987.01 2521.1,3987.01 2564.57,3943.54 2564.57,3793.54 2524.57,3753.54 2324.57,3753.54 ; C91.1@2248.03,1903.78 2321.1,1903.78 C101.1@2324.57,1900.32 ; C91.1@2248.03,3793.54 2321.1,3793.54 C101.1@2324.57,3790.08 ; C101.1@2318.03,1893.78 C101.1@2324.57,1900.32 ; C101.1@2318.03,3783.54 C101.1@2324.57,3790.08 ; C81.1@2324.57,1827.24 2324.57,1863.78 ; C81.1@2324.57,3717.01 2324.57,3753.54 ; R171.2@2968.78,1923.78 2968.78,2012.24 C151.2@2990.31,2033.78 ; R171.2@2968.78,3813.54 2968.78,3902.01 C151.2@2990.31,3923.54 ; C181.2@2990.31,1843.78 R171.2@2990.31,1902.24 ; C181.2@2990.31,3733.54 R171.2@2990.31,3792.01 ; C181.2@2993.78,1843.78 2993.78,1813.78 3014.78,1792.78 3072.78,1792.78 3132.83,1852.83 U1.19@3175.91,1852.83 ; C181.2@2993.78,3733.54 2993.78,3703.54 3014.78,3682.54 3072.78,3682.54 3132.83,3742.6 U1.19@3175.91,3742.6 ; U1.16@3175.91,1911.89 3165.67,1911.89 3103.78,1973.78 3050.31,1973.78 C151.2@2990.31,2033.78 ; U1.16@3175.91,3801.65 3165.67,3801.65 3103.78,3863.54 3050.31,3863.54 C151.2@2990.31,3923.54 ; C131.2@3190.31,2083.78 3190.31,2127.24 ; C131.2@3190.31,3973.54 3190.31,4017.01 ; C41.1@3287.78,1585.78 3395.24,1585.78 C1.1@3423.78,1557.24 ; C41.1@3287.78,3475.54 3395.24,3475.54 C1.1@3423.78,3447.01 ; U2.1@3307.95,1303.23 3453.23,1303.23 3487.24,1337.24 C2.1@3487.24,1393.78 3507.24,1373.78 3783.78,1373.78 3803.78,1393.78 H1.1@3803.78,1453.78 3803.78,1573.78 3783.78,1593.78 3463.78,1593.78 C1.1@3423.78,1553.78 ; U2.1@3307.95,3192.99 3453.23,3192.99 3487.24,3227.01 C2.1@3487.24,3283.54 3507.24,3263.54 3783.78,3263.54 3803.78,3283.54 H1.1@3803.78,3343.54 3803.78,3463.54 3783.78,3483.54 3463.78,3483.54 C1.1@3423.78,3443.54 ; C123.2@3337.24,2563.78 3337.24,2774.41 3333.78,2777.87 3333.78,2977.87 3133.78,2977.87 3133.78,2777.87 3133.78,2493.78 3143.78,2483.78 C122.2@3190.31,2483.78 C122B.2@3190.31,2423.78 C122C.2@3190.31,2363.78 3190.31,2127.24 ; C123.2@3337.24,4453.54 3337.24,4664.17 3333.78,4667.64 3333.78,4867.64 3133.78,4867.64 3133.78,4667.64 3133.78,4383.54 3143.78,4373.54 C122.2@3190.31,4373.54 C122B.2@3190.31,4313.54 C122C.2@3190.31,4253.54 3190.31,4017.01 ; C124.1@3433.78,2237.24 3450.32,2237.24 3503.78,2183.78 C111.1@3503.78,2097.24 3820.32,2097.24 3863.78,2053.78 3863.78,1903.78 3823.78,1863.78 3623.78,1863.78 ; C124.1@3433.78,4127.01 3450.31,4127.01 3503.78,4073.54 C111.1@3503.78,3987.01 3820.31,3987.01 3863.78,3943.54 3863.78,3793.54 3823.78,3753.54 3623.78,3753.54 ; C91.1@3547.24,1903.78 3620.32,1903.78 C101.1@3623.78,1900.32 ; C91.1@3547.24,3793.54 3620.31,3793.54 C101.1@3623.78,3790.08 ; C101.1@3617.24,1893.78 C101.1@3623.78,1900.32 ; C101.1@3617.24,3783.54 C101.1@3623.78,3790.08 ; C81.1@3623.78,1827.24 3623.78,1863.78 ; C81.1@3623.78,3717.01 3623.78,3753.54 ; R171.2@4267.99,1923.78 4267.99,2012.24 C151.2@4289.53,2033.78 ; R171.2@4267.99,3813.54 4267.99,3902.01 C151.2@4289.53,3923.54 ; C181.2@4289.53,1843.78 R171.2@4289.53,1902.24 ; C181.2@4289.53,3733.54 R171.2@4289.53,3792.01 ; C181.2@4292.99,1843.78 4292.99,1813.78 4313.99,1792.78 4371.99,1792.78 4432.05,1852.83 U1.19@4475.12,1852.83 ; C181.2@4292.99,3733.54 4292.99,3703.54 4313.99,3682.54 4371.99,3682.54 4432.05,3742.6 U1.19@4475.12,3742.6 ; U1.16@4475.12,1911.89 4464.88,1911.89 4402.99,1973.78 4349.53,1973.78 C151.2@4289.53,2033.78 ; U1.16@4475.12,3801.65 4464.88,3801.65 4402.99,3863.54 4349.53,3863.54 C151.2@4289.53,3923.54 ; C131.2@4489.53,2083.78 4489.53,2127.24 ; C131.2@4489.53,3973.54 4489.53,4017.01 ; C41.1@4586.99,1585.78 4694.46,1585.78 C1.1@4722.99,1557.24 ; C41.1@4586.99,3475.54 4694.46,3475.54 C1.1@4722.99,3447.01 ; U2.1@4607.17,1303.23 4752.44,1303.23 4786.46,1337.24 C2.1@4786.46,1393.78 4806.46,1373.78 5082.99,1373.78 5102.99,1393.78 H1.1@5102.99,1453.78 5102.99,1573.78 5082.99,1593.78 4762.99,1593.78 C1.1@4722.99,1553.78 ; U2.1@4607.17,3192.99 4752.44,3192.99 4786.46,3227.01 C2.1@4786.46,3283.54 4806.46,3263.54 5082.99,3263.54 5102.99,3283.54 H1.1@5102.99,3343.54 5102.99,3463.54 5082.99,3483.54 4762.99,3483.54 C1.1@4722.99,3443.54 ; C123.2@4636.46,2563.78 4636.46,2774.41 4632.99,2777.87 4632.99,2977.87 4432.99,2977.87 4432.99,2777.87 4432.99,2493.78 4442.99,2483.78 C122.2@4489.53,2483.78 C122B.2@4489.53,2423.78 C122C.2@4489.53,2363.78 4489.53,2127.24 ; C123.2@4636.46,4453.54 4636.46,4664.17 4632.99,4667.64 4632.99,4867.64 4432.99,4867.64 4432.99,4667.64 4432.99,4383.54 4442.99,4373.54 C122.2@4489.53,4373.54 C122B.2@4489.53,4313.54 C122C.2@4489.53,4253.54 4489.53,4017.01 ; C124.1@4732.99,2237.24 4749.53,2237.24 4802.99,2183.78 C111.1@4802.99,2097.24 5119.53,2097.24 5162.99,2053.78 5162.99,1903.78 5122.99,1863.78 4922.99,1863.78 ; C124.1@4732.99,4127.01 4749.53,4127.01 4802.99,4073.54 C111.1@4802.99,3987.01 5119.53,3987.01 5162.99,3943.54 5162.99,3793.54 5122.99,3753.54 4922.99,3753.54 ; C91.1@4846.46,1903.78 4919.53,1903.78 C101.1@4922.99,1900.32 ; C91.1@4846.46,3793.54 4919.53,3793.54 C101.1@4922.99,3790.08 ; C101.1@4916.46,1893.78 C101.1@4922.99,1900.32 ; C101.1@4916.46,3783.54 C101.1@4922.99,3790.08 ; C81.1@4922.99,1827.24 4922.99,1863.78 ; C81.1@4922.99,3717.01 4922.99,3753.54 ; C151.2@1691.1,2033.78 C141.1@1691.1,2103.78 1691.1,2140.32 1714.57,2163.78 1854.57,2163.78 1891.1,2127.24 ; C151.2@1691.1,3923.54 C141.1@1691.1,3993.54 1691.1,4030.08 1714.57,4053.54 1854.57,4053.54 1891.1,4017.01 ; 2324.57,1863.78 C101.1@2324.57,1900.32 ; 2324.57,3753.54 C101.1@2324.57,3790.08 ; C151.2@2990.31,2033.78 C141.1@2990.32,2103.78 2990.32,2140.32 3013.78,2163.78 3153.78,2163.78 3190.31,2127.24 ; C151.2@2990.31,3923.54 C141.1@2990.31,3993.54 2990.31,4030.08 3013.78,4053.54 3153.78,4053.54 3190.31,4017.01 ; 3623.78,1863.78 C101.1@3623.78,1900.32 ; 3623.78,3753.54 C101.1@3623.78,3790.08 ; C151.2@4289.53,2033.78 C141.1@4289.53,2103.78 4289.53,2140.32 4312.99,2163.78 4452.99,2163.78 4489.53,2127.24 ; C151.2@4289.53,3923.54 C141.1@4289.53,3993.54 4289.53,4030.08 4312.99,4053.54 4452.99,4053.54 4489.53,4017.01 ; 4922.99,1863.78 C101.1@4922.99,1900.32 ; 4922.99,3753.54 C101.1@4922.99,3790.08
"NetANTEN 50om_1": "ANTEN 50om.1" C125.2 | length 1243.2
  Top Layer w10: 1934.57,2877.87 1934.57,2727.24 C125.2@1974.57,2687.24 ; 1934.57,4767.64 1934.57,4617.01 C125.2@1974.57,4577.01 ; 3233.78,2877.87 3233.78,2727.24 C125.2@3273.78,2687.24 ; 3233.78,4767.64 3233.78,4617.01 C125.2@3273.78,4577.01 ; 4532.99,2877.87 4532.99,2727.24 C125.2@4572.99,2687.24 ; 4532.99,4767.64 4532.99,4617.01 C125.2@4572.99,4577.01
NetC51_2: C51.2 U1.5 | length 952.1
  Top Layer w10: U1.5@2002.68,1785.91 2002.68,1729.67 2059.57,1672.78 C51.2@2059.57,1650.78 ; U1.5@2002.68,3675.67 2002.68,3619.43 2059.57,3562.54 C51.2@2059.57,3540.54 ; U1.5@3301.89,1785.91 3301.89,1729.67 3358.78,1672.78 C51.2@3358.78,1650.78 ; U1.5@3301.89,3675.67 3301.89,3619.43 3358.78,3562.54 C51.2@3358.78,3540.54 ; U1.5@4601.1,1785.91 4601.1,1729.67 4657.99,1672.78 C51.2@4657.99,1650.78 ; U1.5@4601.1,3675.67 4601.1,3619.43 4657.99,3562.54 C51.2@4657.99,3540.54
NetC81_2: C81.2 U1.8 X1.1 | length 2745.9
  Top Layer w10: U1.8@2049.92,1872.52 2145.83,1872.52 2258.03,1760.31 C81.2@2324.57,1760.31 X1.1@2461.1,1760.31 ; U1.8@2049.92,3762.28 2145.83,3762.28 2258.03,3650.08 C81.2@2324.57,3650.08 X1.1@2461.1,3650.08 ; U1.8@3349.13,1872.52 3445.04,1872.52 3557.24,1760.32 C81.2@3623.78,1760.32 X1.1@3760.31,1760.32 ; U1.8@3349.13,3762.28 3445.04,3762.28 3557.24,3650.08 C81.2@3623.78,3650.08 X1.1@3760.31,3650.08 ; U1.8@4648.35,1872.52 4744.25,1872.52 4856.46,1760.31 C81.2@4922.99,1760.31 X1.1@5059.53,1760.31 ; U1.8@4648.35,3762.28 4744.25,3762.28 4856.46,3650.08 C81.2@4922.99,3650.08 X1.1@5059.53,3650.08
NetC101_2: C101.2 U1.10 X1.2 | length 2634.1
  Top Layer w10: U1.10@2049.92,1911.89 2102.68,1911.89 2158.03,1967.24 C101.2@2324.57,1967.24 2461.1,1967.24 X1.2@2464.57,1963.78 ; U1.10@2049.92,3801.65 2102.68,3801.65 2158.03,3857.01 C101.2@2324.57,3857.01 2461.1,3857.01 X1.2@2464.57,3853.54 ; U1.10@3349.13,1911.89 3401.89,1911.89 3457.24,1967.24 C101.2@3623.78,1967.24 3760.31,1967.24 X1.2@3763.78,1963.78 ; U1.10@3349.13,3801.65 3401.89,3801.65 3457.24,3857.01 C101.2@3623.78,3857.01 3760.31,3857.01 X1.2@3763.78,3853.54 ; U1.10@4648.35,1911.89 4701.1,1911.89 4756.46,1967.24 C101.2@4922.99,1967.24 5059.53,1967.24 X1.2@5062.99,1963.78 ; U1.10@4648.35,3801.65 4701.1,3801.65 4756.46,3857.01 C101.2@4922.99,3857.01 5059.53,3857.01 X1.2@5062.99,3853.54
NetC121_1: C121.1 L122.1 L131.2 | length 1467.6
  Top Layer w10: L131.2@1954.57,2268.78 2023.03,2268.78 C121.1@2054.57,2237.24 L122.1@2054.57,2368.78 ; L131.2@1954.57,4158.54 2023.03,4158.54 C121.1@2054.57,4127.01 L122.1@2054.57,4258.54 ; L131.2@3253.78,2268.78 3322.24,2268.78 C121.1@3353.78,2237.24 L122.1@3353.78,2368.78 ; L131.2@3253.78,4158.54 3322.24,4158.54 C121.1@3353.78,4127.01 L122.1@3353.78,4258.54 ; L131.2@4552.99,2268.78 4621.46,2268.78 C121.1@4652.99,2237.24 L122.1@4652.99,2368.78 ; L131.2@4552.99,4158.54 4621.46,4158.54 C121.1@4652.99,4127.01 L122.1@4652.99,4258.54
NetC121_2: C121.2 L121.2 U1.12 | length 1445
  Top Layer w10: U1.12@1982.99,1959.13 1982.99,2022.2 2039.57,2078.78 L121.2@2039.57,2083.78 2054.57,2098.78 C121.2@2054.57,2170.31 ; U1.12@1982.99,3848.9 1982.99,3911.97 2039.57,3968.54 L121.2@2039.57,3973.54 2054.57,3988.54 C121.2@2054.57,4060.08 ; U1.12@3282.2,1959.13 3282.2,2022.2 3338.78,2078.78 L121.2@3338.78,2083.78 3353.78,2098.78 C121.2@3353.78,2170.32 ; U1.12@3282.2,3848.9 3282.2,3911.97 3338.78,3968.54 L121.2@3338.78,3973.54 3353.78,3988.54 C121.2@3353.78,4060.08 ; U1.12@4581.42,1959.13 4581.42,2022.2 4637.99,2078.78 L121.2@4637.99,2083.78 4652.99,2098.78 C121.2@4652.99,2170.31 ; U1.12@4581.42,3848.9 4581.42,3911.97 4637.99,3968.54 L121.2@4637.99,3973.54 4652.99,3988.54 C121.2@4652.99,4060.08
NetC122_1: C122.1 C122B.1 C122C.1 L122.2 L123.1 | length 1996.9
  Top Layer w10: L123.1@1894.57,2548.78 1919.57,2548.78 1958.03,2510.32 C122.1@1958.03,2483.78 ; L123.1@1894.57,4438.54 1919.57,4438.54 1958.03,4400.08 C122.1@1958.03,4373.54 ; C122C.1@1958.03,2363.78 C122B.1@1958.03,2423.78 C122.1@1958.03,2483.78 ; C122C.1@1958.03,4253.54 C122B.1@1958.03,4313.54 C122.1@1958.03,4373.54 ; L122.2@2054.57,2458.78 2029.57,2483.78 C122.1@1958.03,2483.78 ; L122.2@2054.57,4348.54 2029.57,4373.54 C122.1@1958.03,4373.54 ; L123.1@3193.78,2548.78 3218.78,2548.78 3257.24,2510.32 C122.1@3257.24,2483.78 ; L123.1@3193.78,4438.54 3218.78,4438.54 3257.24,4400.08 C122.1@3257.24,4373.54 ; C122C.1@3257.24,2363.78 C122B.1@3257.24,2423.78 C122.1@3257.24,2483.78 ; C122C.1@3257.24,4253.54 C122B.1@3257.24,4313.54 C122.1@3257.24,4373.54 ; L122.2@3353.78,2458.78 3328.78,2483.78 C122.1@3257.24,2483.78 ; L122.2@3353.78,4348.54 3328.78,4373.54 C122.1@3257.24,4373.54 ; L123.1@4492.99,2548.78 4517.99,2548.78 4556.46,2510.32 C122.1@4556.46,2483.78 ; L123.1@4492.99,4438.54 4517.99,4438.54 4556.46,4400.08 C122.1@4556.46,4373.54 ; C122C.1@4556.46,2363.78 C122B.1@4556.46,2423.78 C122.1@4556.46,2483.78 ; C122C.1@4556.46,4253.54 C122B.1@4556.46,4313.54 C122.1@4556.46,4373.54 ; L122.2@4652.99,2458.78 4627.99,2483.78 C122.1@4556.46,2483.78 ; L122.2@4652.99,4348.54 4627.99,4373.54 C122.1@4556.46,4373.54
NetC123_1: C123.1 C125.1 L123.2 | length 717
  Top Layer w10: L123.2@1913.03,2620.32 C125.1@1974.57,2620.32 1974.57,2567.24 C123.1@1971.1,2563.78 ; L123.2@1913.03,4510.08 C125.1@1974.57,4510.08 1974.57,4457.01 C123.1@1971.1,4453.54 ; L123.2@3212.24,2620.32 C125.1@3273.78,2620.32 3273.78,2567.24 C123.1@3270.32,2563.78 ; L123.2@3212.24,4510.08 C125.1@3273.78,4510.08 3273.78,4457.01 C123.1@3270.31,4453.54 ; L123.2@4511.46,2620.32 C125.1@4572.99,2620.32 4572.99,2567.24 C123.1@4569.53,2563.78 ; L123.2@4511.46,4510.08 C125.1@4572.99,4510.08 4572.99,4457.01 C123.1@4569.53,4453.54
NetC124_2: C124.2 L121.1 | length 531.6
  Top Layer w10: L121.1@2129.57,2083.78 2134.57,2088.78 C124.2@2134.57,2170.31 ; L121.1@2129.57,3973.54 2134.57,3978.54 C124.2@2134.57,4060.08 ; L121.1@3428.78,2083.78 3433.78,2088.78 C124.2@3433.78,2170.32 ; L121.1@3428.78,3973.54 3433.78,3978.54 C124.2@3433.78,4060.08 ; L121.1@4727.99,2083.78 4732.99,2088.78 C124.2@4732.99,2170.31 ; L121.1@4727.99,3973.54 4732.99,3978.54 C124.2@4732.99,4060.08
NetC131_1: C131.1 L131.1 U1.13 | length 1265.4
  Top Layer w10: C131.1@1958.03,2083.78 L131.1@1958.03,2175.32 ; C131.1@1958.03,3973.54 L131.1@1958.03,4065.08 ; U1.13@1963.31,1959.13 C131.1@1963.31,2078.5 ; U1.13@1963.31,3848.9 C131.1@1963.31,3968.27 ; C131.1@3257.24,2083.78 L131.1@3257.24,2175.32 ; C131.1@3257.24,3973.54 L131.1@3257.24,4065.08 ; U1.13@3262.52,1959.13 C131.1@3262.52,2078.5 ; U1.13@3262.52,3848.9 C131.1@3262.52,3968.27 ; C131.1@4556.46,2083.78 L131.1@4556.46,2175.32 ; C131.1@4556.46,3973.54 L131.1@4556.46,4065.08 ; U1.13@4561.73,1959.13 C131.1@4561.73,2078.5 ; U1.13@4561.73,3848.9 C131.1@4561.73,3968.27
NetR171_1: R171.1 U1.17 | length 781.2
  Top Layer w10: R171.1@1759.57,1923.78 1791.14,1892.2 U1.17@1876.69,1892.2 ; R171.1@1759.57,3813.54 1791.14,3781.97 U1.17@1876.69,3781.97 ; R171.1@3058.78,1923.78 3090.35,1892.2 U1.17@3175.91,1892.2 ; R171.1@3058.78,3813.54 3090.35,3781.97 U1.17@3175.91,3781.97 ; R171.1@4357.99,1923.78 4389.57,1892.2 U1.17@4475.12,1892.2 ; R171.1@4357.99,3813.54 4389.57,3781.97 U1.17@4475.12,3781.97
SCK: P1.3 U1.1 | length 3488.3
  Top Layer w10: P1.3@1434.57,1923.78 1494.57,1923.78 1674.57,1743.78 1881.81,1743.78 U1.1@1923.94,1785.91 ; P1.3@1434.57,3813.54 1494.57,3813.54 1674.57,3633.54 1881.81,3633.54 U1.1@1923.94,3675.67 ; P1.3@2733.78,1923.78 2793.78,1923.78 2973.78,1743.78 3181.02,1743.78 U1.1@3223.15,1785.91 ; P1.3@2733.78,3813.54 2793.78,3813.54 2973.78,3633.54 3181.02,3633.54 U1.1@3223.15,3675.67 ; P1.3@4032.99,1923.78 4092.99,1923.78 4272.99,1743.78 4480.24,1743.78 U1.1@4522.36,1785.91 ; P1.3@4032.99,3813.54 4092.99,3813.54 4272.99,3633.54 4480.24,3633.54 U1.1@4522.36,3675.67
SI: P1.2 U1.20 | length 4009.1
  Top Layer w10: P1.2@1434.57,2023.78 1574.57,2023.78 1614.57,1983.78 1614.57,1843.78 1691.57,1766.78 1827.57,1766.78 1876.69,1815.91 U1.20@1876.69,1833.15 ; P1.2@1434.57,3913.54 1574.57,3913.54 1614.57,3873.54 1614.57,3733.54 1691.57,3656.54 1827.57,3656.54 1876.69,3705.67 U1.20@1876.69,3722.91 ; P1.2@2733.78,2023.78 2873.78,2023.78 2913.78,1983.78 2913.78,1843.78 2990.78,1766.78 3126.78,1766.78 3175.91,1815.91 U1.20@3175.91,1833.15 ; P1.2@2733.78,3913.54 2873.78,3913.54 2913.78,3873.54 2913.78,3733.54 2990.78,3656.54 3126.78,3656.54 3175.91,3705.67 U1.20@3175.91,3722.91 ; P1.2@4032.99,2023.78 4172.99,2023.78 4212.99,1983.78 4212.99,1843.78 4289.99,1766.78 4425.99,1766.78 4475.12,1815.91 U1.20@4475.12,1833.15 ; P1.2@4032.99,3913.54 4172.99,3913.54 4212.99,3873.54 4212.99,3733.54 4289.99,3656.54 4425.99,3656.54 4475.12,3705.67 U1.20@4475.12,3722.91
SO: P1.1 U1.2 | length 5393.4
  Top Layer w10: v1(1534.57,1813.78) 1628.57,1719.78 1930.57,1719.78 1943.62,1732.83 U1.2@1943.62,1785.91 ; v1(1534.57,3703.54) 1628.57,3609.54 1930.57,3609.54 1943.62,3622.6 U1.2@1943.62,3675.67 ; v1(2833.78,1813.78) 2927.78,1719.78 3229.78,1719.78 3242.83,1732.83 U1.2@3242.83,1785.91 ; v1(2833.78,3703.54) 2927.78,3609.54 3229.78,3609.54 3242.83,3622.6 U1.2@3242.83,3675.67 ; v1(4132.99,1813.78) 4226.99,1719.78 4528.99,1719.78 4542.05,1732.83 U1.2@4542.05,1785.91 ; v1(4132.99,3703.54) 4226.99,3609.54 4528.99,3609.54 4542.05,3622.6 U1.2@4542.05,3675.67
  Bottom Layer w10: P1.1@1434.57,2123.78 1504.57,2123.78 1534.57,2093.78 v1(1534.57,1813.78) ; P1.1@1434.57,4013.54 1504.57,4013.54 1534.57,3983.54 v1(1534.57,3703.54) ; P1.1@2733.78,2123.78 2803.78,2123.78 2833.78,2093.78 v1(2833.78,1813.78) ; P1.1@2733.78,4013.54 2803.78,4013.54 2833.78,3983.54 v1(2833.78,3703.54) ; P1.1@4032.99,2123.78 4102.99,2123.78 4132.99,2093.78 v1(4132.99,1813.78) ; P1.1@4032.99,4013.54 4102.99,4013.54 4132.99,3983.54 v1(4132.99,3703.54)
pads on no net: C1.0 C2.0 C41.0 C51.0 C81.0 C91.0 C101.0 C111.0 C121.0 C122.0 C122B.0 C122C.0 C123.0 C124.0 C125.0 C131.0 C141.0 C151.0 C181.0
copper on no net: | length 73158